# Altium PCB nrf52840_qfaa.PcbDoc
Units mm, origin at the board's own origin, x right, y up, seen from the top; angles counter-clockwise.
Board outline 16 x 13.5 mm, 2 copper layers (Top Layer, Bottom Layer), stack 1.671 mm thick; 23 components, 44 nets, 95 pads, 62 vias.
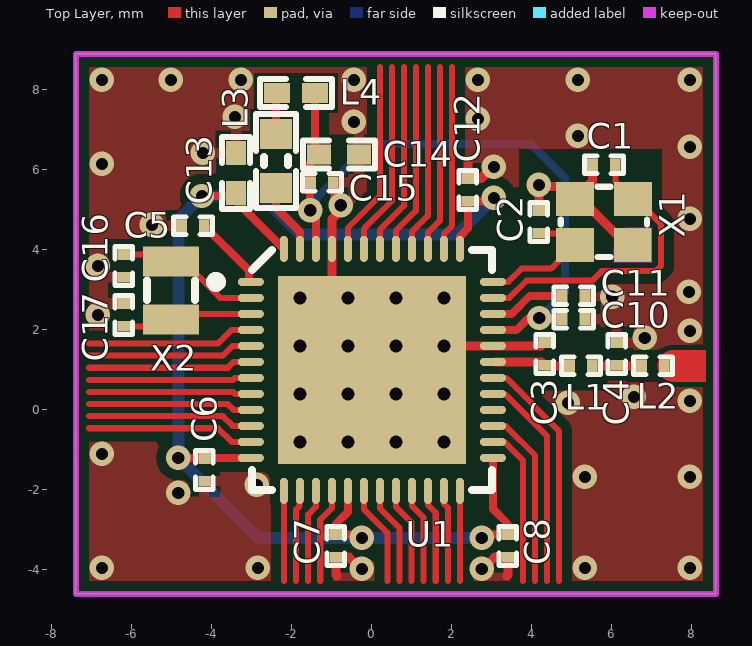
[diagram p0: Top Layer view]
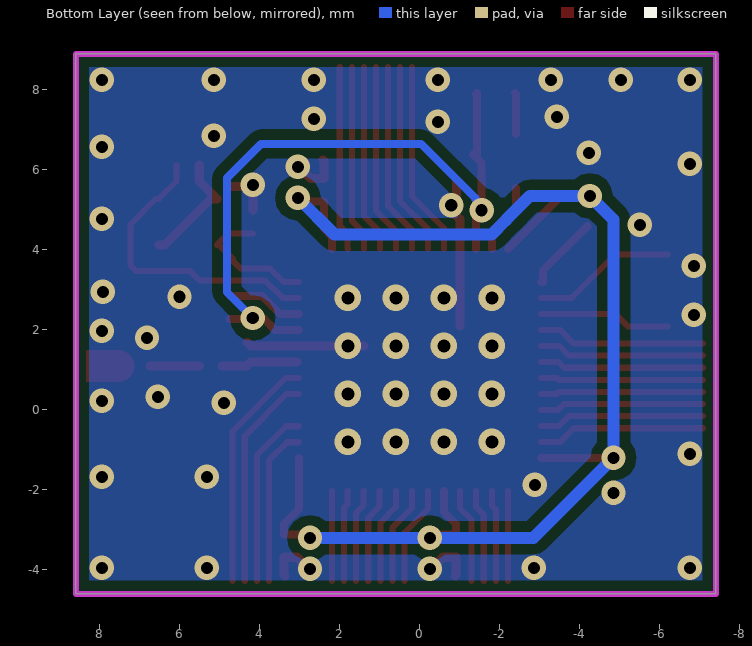
[diagram p1: Bottom Layer view, seen from below]
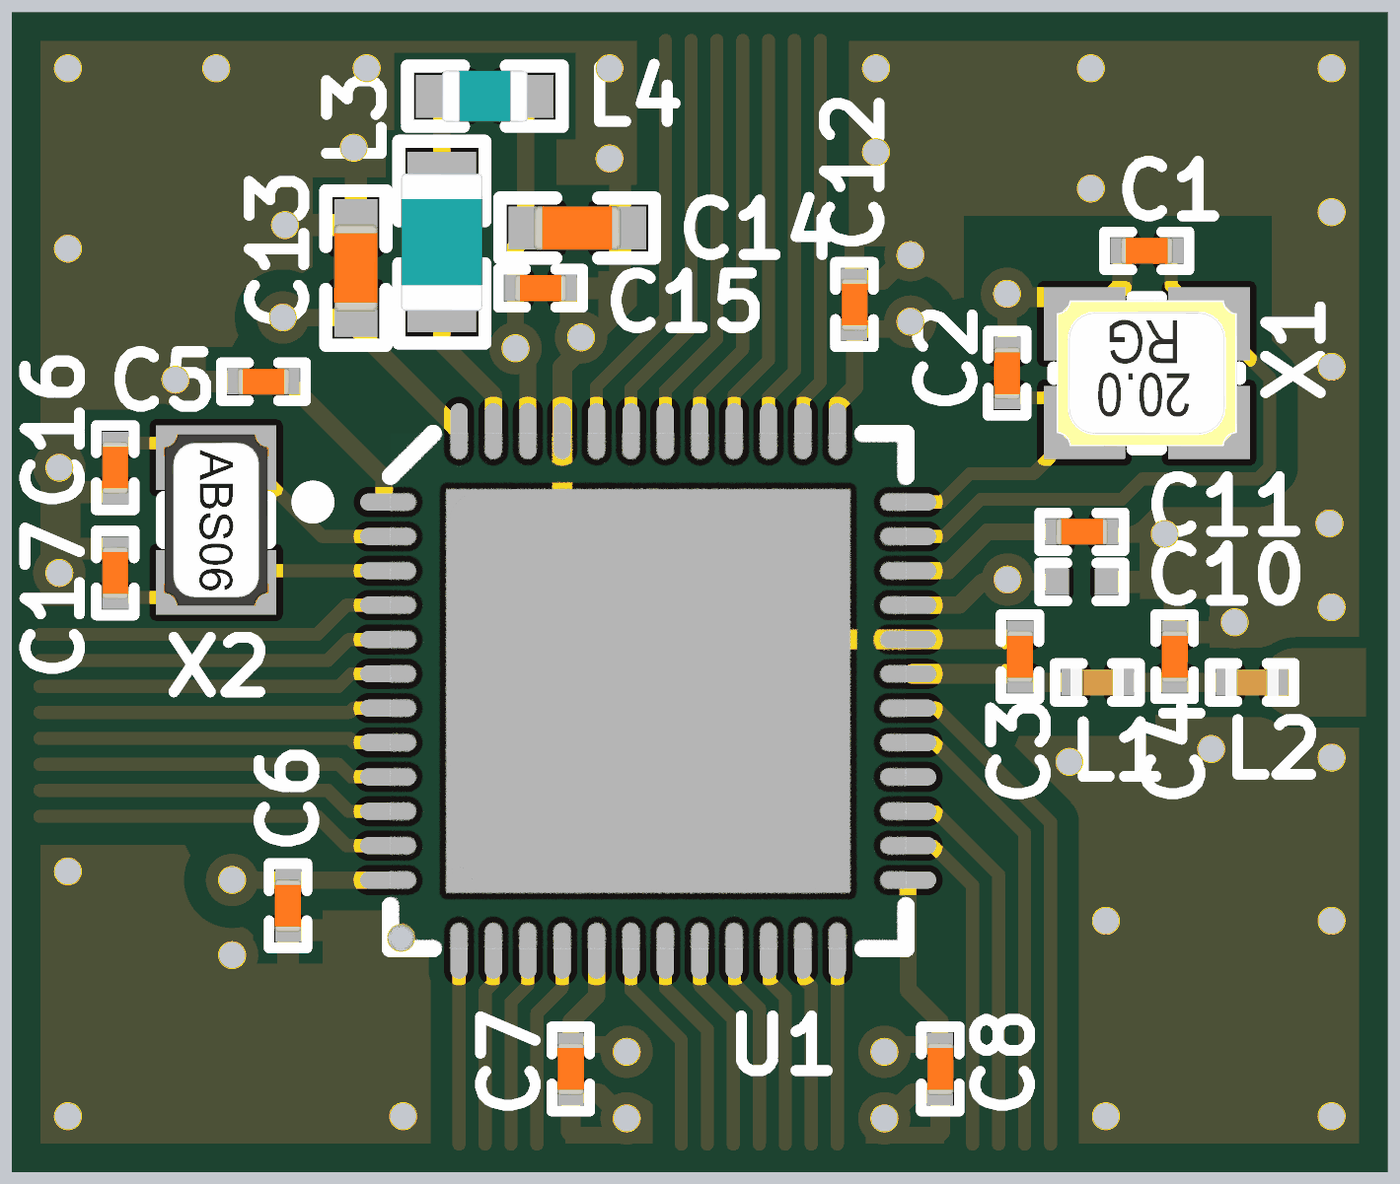
[diagram p2: 3D render of the assembled board from above, using the file's embedded part models]

## Layer stack, top to bottom
Top Solder: solder mask 0.0102, Solder Resist, Dk 3.5
Top Layer: signal copper 0.0356
Dielectric1: core 1.6002, FR-4, Dk 4.8
Bottom Layer: signal copper 0.0356
Bottom Solder: solder mask 0.0102, Solder Resist, Dk 3.5

## Board outline
-7.4,-4.6 8.6,-4.6 8.6,8.9 -7.4,8.9

## Design rules (kind name [scope] priority, off if disabled: settings)
Clearance Polygon_ANT [(InNamedPolygon('Top_Layer-GND')) or (InNamedPolygon('Bottom_Layer-GND')) vs InNet('RF')] p1: gap=0.127 ignorepadtopadclearanceinfootprint=FALSE except(0: Arc-Hole Track-Hole SMDPad-Hole THPad-Hole Via-Hole Fill-Hole Poly-Hole Region-Hole Text-Hole)
Clearance Polygon [(InNamedPolygon('Top_Layer-GND')) or (InNamedPolygon('Bottom_Layer-GND'))] p2: gap=0.254 ignorepadtopadclearanceinfootprint=FALSE except(0: Arc-Hole Track-Hole SMDPad-Hole THPad-Hole Via-Hole Fill-Hole Poly-Hole Region-Hole Text-Hole)
Clearance [All] p3: gap=0.15 ignorepadtopadclearanceinfootprint=FALSE
ComponentClearance [All] p1 off: gap=0.254 collisioncheckmode=3 verticalgap=0.254 showdistances=FALSE
FabricationTestPointUsage TestPointUsage [All] p1: valid=0 allowmultiple=FALSE
FabricationTestpoint Testpoint [All] p1: side=3 testpointundercomponent=TRUE minsize=1.016 maxsize=2.54 preferedsize=1.524 minholesize=0 maxholesize=1.016 preferedholesize=0.813 testpointgrid=0.025 allowsidetop=TRUE allowsidebottom=TRUE usegrid=TRUE gridtolerance=0
Height [All] p1 off: minheight=0 maxheight=25.4 prefheight=12.7
HoleSize [All] p1: absolutevalues=TRUE maxlimit=4.064 minlimit=0.305 maxpercent=80.000 minpercent=20.000
MinimumAnnularRing [All] p1 off: minimumring=0.152
PolygonConnect PolygonConnect_1 [isVia and innet(gnd)] p1: connectstyle=Direct reliefconductorwidth=0.254 reliefentries=4 polygonreliefangle="90 Angle" airgapwidth=0.254
PolygonConnect [All] p2: connectstyle=Relief reliefconductorwidth=0.254 reliefentries=4 polygonreliefangle="90 Angle" airgapwidth=0.254
RoutingVias [All] p1: holewidth=0.406 width=0.813 viastyle="Through Hole" minholewidth=0.254 minwidth=0.254 maxholewidth=0.711 maxwidth=1.27
SilkToSolderMaskClearance SilkscreenOverComponentPads [IsPad] p1: minsilkscreentomaskgap=0.254 clearancetoexposedcopper=TRUE
SolderMaskExpansion SolderMaskExpansion_via [IsVia] p1: expansion=0.102 istentingtop=TRUE
SolderMaskExpansion [All] p2: expansion=0.076 istentingtop=FALSE
Width [All] p1: maxlimit=2.54 minlimit=0.15 preferedwidth=0.15
24 further rules are at their usual default settings.

## Components (designator, comment, footprint, x,y, rotation, side; value= is the part's Value field where it differs from the comment)
C1 "12pF" CAPC0603X03L_C#1 5.8,6.125 r180 top
C2 "12pF" CAPC0603X03L_C#1 4.175,4.7 r90 top
C3 "1.0pF" CAPC0603X03L_C#1 4.325,1.4 r270 top
C4 "1.2pF" CAPC0603X03L_C#1 6.125,1.4 r270 top
C5 "100nF" CAPC0603X03L_C#2 -4.475,4.601 r180 top
C6 "100nF" CAPC0603X03L_C#2 -4.19,-1.5 r270 top
C7 "100nF" CAPC0603X03L_C#2 -0.9,-3.4 r270 top
C8 "100nF" CAPC0603X03L_C#2 3.398,-3.4 r270 top
C10 "N.C." CAPC0603X03L_C_NC 5.045,2.27 r180 top
C11 "100pF" CAPC0603X03L_C#1 5.045,2.854 r0 top
C12 "100nF" CAPC0603X03L_C#2 2.4,5.5 r90 top
C13 "1.0µF" CAPC1005X04L -3.4,5.925 r90 top
C14 "1.0µF" CAPC1005X04L -0.825,6.39 r180 top
C15 "47nF" CAPC0603X03L_C#1 -1.251,5.69 r0 top
C16 "12pF" CAPC0603X03L_C#2 -6.2,3.6 r270 top
C17 "12pF" CAPC0603X03L_C#2 -6.2,2.375 r90 top
L1 "4.7nH" INDC0603X03L_C 5.225,1.1 r0 top
L2 "2.2nH" INDC0603X03L_C 7.025,1.1 r0 top
L3 "10µH" INDC1608X06L -2.4,6.225 r270 top
L4 "15nH" INDC1005X04L -1.9,7.925 r180 top
U1 "nRF52840-QFAA" QFN40P600X600X90-48N 0,1 r0 top locked
X1 "32MHz" XTAL_2016_NT 5.8,4.7 r180 top
X2 "32.768kHz" XTAL_2012 -5.025,2.99 r270 top

## Footprints (in the part's own frame and the unit in brackets; to place one, negate y for a bottom-side part, rotate by r counter-clockwise, add the part's x,y. Pads: shape width x height; smd on the part's side, far side on the other; paste and mask are expansions set on the pad)
CAPC0603X03L_C#1 [mm] "Chip Capacitor, 2-Leads, Body 0.6x0.3mm, IPC High Density"
  rect 0.27x0.3 smd: 1(-0.285,0) 2(0.285,0)
  silkscreen extent -0.49,-0.22 0.49,0.22, body extent -0.3,-0.15 0.31,0.15, height 0.3
CAPC0603X03L_C#2 [mm] "Chip Capacitor, 2-Leads, Body 0.6x0.3mm, IPC High Density"
  rect 0.27x0.3 smd mask+0.05: 1(-0.285,0) 2(0.285,0)
  silkscreen extent -0.49,-0.22 0.49,0.22, body extent -0.3,-0.15 0.31,0.15, height 0.3
CAPC0603X03L_C_NC [mm] "Chip Capacitor, 2-Leads, Body 0.6x0.3mm, IPC High Density"
  rect 0.27x0.3 smd mask+0.05: 1(-0.285,0) 2(0.285,0)
  silkscreen extent -0.49,-0.22 0.49,0.22
CAPC1005X04L [mm] "Chip Capacitor, 2-Leads, Body 1.0x0.5mm, IPC High Density"
  rect 0.6x0.5 smd: 1(-0.5,0) 2(0.5,0)
  silkscreen extent -0.9,-0.35 0.9,0.35, body extent -0.51,-0.25 0.51,0.25, height 0.5
INDC0603X03L_C [mm] "Chip Inductor, 2-Leads, Body 0.6x0.3mm, IPC High Density"
  rect 0.27x0.3 smd: 1(-0.285,0) 2(0.285,0)
  silkscreen extent -0.49,-0.22 0.49,0.22, body extent -0.31,-0.16 0.31,0.16, height 0.26
INDC1005X04L [mm] "Chip Inductor, 2-Leads, Body 1.0x0.5mm, IPC High Density"
  rect 0.65x0.5 smd: 1(-0.475,0) 2(0.475,0)
  silkscreen extent -0.9,-0.35 0.9,0.35, body extent -0.5,-0.3 0.5,0.3, height 0.5
INDC1608X06L [mm] "Chip Inductor, 2-Leads, Body 1.6x0.8mm, IPC High Density"
  rect 0.75x0.8 smd: 1(-0.675,0) 2(0.675,0)
  silkscreen extent -1.17,-0.5 1.17,0.5, body extent -0.8,-0.48 0.8,0.48, height 0.8
QFN40P600X600X90-48N [mm] "QFN, 48-Leads, Body 6,0x6,0mm (max), Pitch 0,40mm, IPC Medium Density"
  oval 0.65x0.2 smd: 1(-3.025,2.2) 2(-3.025,1.8) 3(-3.025,1.4) 4(-3.025,1) 5(-3.025,0.6) 6(-3.025,0.2) 7(-3.025,-0.2) 8(-3.025,-0.6) 9(-3.025,-1) 10(-3.025,-1.4) 11(-3.025,-1.8) 12(-3.025,-2.2) 25(3.025,-2.2) 26(3.025,-1.8) 27(3.025,-1.4) 28(3.025,-1) 29(3.025,-0.6) 30(3.025,-0.2) 31(3.025,0.2) 32(3.025,0.6) 33(3.025,1) 34(3.025,1.4) 35(3.025,1.8) 36(3.025,2.2)
  oval 0.2x0.65 smd: 13(-2.2,-3.025) 14(-1.8,-3.025) 15(-1.4,-3.025) 16(-1,-3.025) 17(-0.6,-3.025) 18(-0.2,-3.025) 19(0.2,-3.025) 20(0.6,-3.025) 21(1,-3.025) 22(1.4,-3.025) 23(1.8,-3.025) 24(2.2,-3.025) 37(2.2,3.025) 38(1.8,3.025) 39(1.4,3.025) 40(1,3.025) 41(0.6,3.025) 42(0.2,3.025) 43(-0.2,3.025) 44(-0.6,3.025) 45(-1,3.025) 46(-1.4,3.025) 47(-1.8,3.025) 48(-2.2,3.025)
  rect 4.7x4.7 smd: 49(0,0)
  silkscreen extent -4.02,-3 3,3, body extent -3.02,-3.02 3.02,3.02, height 0.86
XTAL_2012 [mm] "XTAL SMD 2.0 x 1.2 mm"
  rect 0.75x1.4 smd: 1(-0.725,0) 2(0.725,0)
  silkscreen extent -0.24,-0.6 0.24,0.6, body extent -1,-0.61 1,0.61, height 0.6
XTAL_2016_NT [mm] "Crystal 2.0 x 1.6 mm"
  rect 0.95x0.85 smd: 1(-0.725,-0.575) 2(-0.725,0.575) 2(0.725,-0.575) 3(0.725,0.575)
  Top Layer lines w0.225: 0.725,-0.575 0.575,-0.575 -0.575,0.575 -0.725,0.575
  Top Layer keep-out lines w0.01: -0.25,0.65 -0.25,1 -1.2,1 -1.2,0.15 -0.55,0.15
  silkscreen extent -1.08,-0.88 1.08,0.88, body extent -1.05,-0.85 1.05,0.85, height 0.56

## Part data
C1 C2 C16 C17: library part C0201-12p, "Capacitor, NP0, ±2%", Component Class=Capacitors, Footprint Doc=0201, LatestRevisionDate=2017-11-09, Pad Count=2, Part Number=C0201-12p, Published=2014-11-13
C3: library part C0201-1.0p, "Capacitor, NP0, ±10%", Component Class=Capacitors, Footprint Doc=0201, LatestRevisionDate=2018-10-22, Pad Count=2, Part Number=C0201-1.0p, Published=2014-11-13
C4: library part C0201-1.2p, "Capacitor, NP0, ±10%", Component Class=Capacitors, Footprint Doc=0201, LatestRevisionDate=2020-10-13, Pad Count=2, Part Number=C0201-1.2p, Published=2014-11-13
C5 C6 C7 C8 C12: library part C0201-100n, "Capacitor, X5R, ±10%", Component Class=Capacitors, Footprint Doc=0201, LatestRevisionDate=2017-11-09, Pad Count=2, Part Number=C0201-100n, Published=2014-11-13
C10: library part C0201-N.C., "Not mounted", Assembly="Not mounted", Component Class=Capacitors, Footprint Doc=0201, LatestRevisionDate=2014-11-13, Pad Count=2, Part Number=C0201-N.C., Published=2014-11-13
C11: library part C0201-100p, "Capacitor, NP0, ±5%", Component Class=Capacitors, Footprint Doc=0201, LatestRevisionDate=2019-04-16, Pad Count=2, Part Number=C0201-100p, Published=2019-04-16
C13 C14: library part C0402-1µ0, "Capacitor, X5R, ±10%", Component Class=Capacitors, Footprint Doc=0402, LatestRevisionDate=2016-08-22, Pad Count=2, Part Number=C0402-1µ0, Published=2009-05-08
C15: library part C0201-47n, "Capacitor, X5R, ±10%", Component Class=Capacitors, Footprint Doc=0201, LatestRevisionDate=2017-11-09, Pad Count=2, Part Number=C0201-47n, Published=2014-11-13
L1: library part L0201-4n7, "High frequency chip inductor ±5%", Component Class=Inductors, Footprint Doc=0201, LatestRevisionDate=2013-04-10, Pad Count=2, Part Number=L0201-4n7, Published=2013-04-10
L2: library part L0201-2n2, "High frequency chip inductor ±5%", Component Class=Inductors, Footprint Doc=0201, LatestRevisionDate=2013-04-10, Pad Count=2, Part Number=L0201-2n2, Published=2013-04-10
L3: library part L0603-10µ-TDK, "Chip inductor, IDC,min = 50 mA, ±20%", Component Class=Inductors, Footprint Doc=0603, LatestRevisionDate=2012-09-19, Pad Count=2, Part Number=L0603-10µ-TDK, Published=2019-05-06
L4: library part L0402-15n, "High frequency chip inductor ±10%", Component Class=Inductors, Footprint Doc=0402, LatestRevisionDate=2012-09-19, Pad Count=2, Part Number=L0402-15n, Published=2010-07-12
U1: "Multi-protocol Bluetooth Low Energy, IEEE 802.15.4, ANT and 2.4GHz proprietary system-on-chip", Component Class=nRF_Devices, Footprint Doc=QFN-48, LatestRevisionDate=2016-11-22, Pad Count=48, Part Number=nRF52840-QFAA, Published=2016-03-31
X1: library part XTAL_SMD2016_32MHz_8pF_General_NT, "XTAL SMD 2016, 32MHz, Cl=8pF, Total Tol: ±30ppm", Component Class=Oscillators, Footprint Doc=XTAL_2016, LatestRevisionDate=2021-04-08, Pad Count=4, Part Number=XTAL_SMD2016_32MHz_8pF_General_NT, Published=2021-04-08
X2: library part XTAL_SMD2012_32.768kHz_9pF_General, "XTAL SMD 2012, 32.768kHz, Cl=9pF, Total Tol: ±50ppm", Component Class=Oscillators, Footprint Doc=XTAL_2012, LatestRevisionDate=2017-01-11, Pad Count=2, Part Number=XTAL_SMD2012_32.768kHz_9pF_General, Published=2016-08-19

## Via types
v1: diameter 0.61, hole 0.305, Top Layer to Bottom Layer, tented both sides, 46 vias
v2: diameter 0.66, hole 0.33, Top Layer to Bottom Layer, tented both sides, 16 vias

## Nets (pads, with @x,y where several pads share a name; then routed paths per layer and width w, separated by ;. In a path a pad name is that pad's centre, name@x,y a point inside that pad or via, vN(x,y) a via of type N, cw(c..) or ccw(c..) an arc to the next point about the centre after c; other vN are vias at no path point)
DEC1: C5.1 U1.1 | length 1.9
  Top Layer w0.2: C5.1 -4.19,4.586 -4.155,4.551 -4.14,4.551 -3.071,3.483 -3.071,3.2 U1.1
DEC3: C11.1 U1.34 | length 1.9
  Top Layer w0.2: U1.34 3.493,2.4 3.946,2.853 C11.1@4.74,2.853
DEC4_6: C10.2 C14.2 C15.1 L4.1 U1.33 U1.46 | length 17.1
  Top Layer w0.2: v1(-1.543,4.991) -1.543,6.172 C14.2 ; C14.2@-1.425,6.39 L4.1 L4.1@-1.4,7.9 ; U1.46 v1@-1.4,4.94 ; U1.33 3.62,2 3.89,2.27 C10.2
  Bottom Layer w0.2: v1(-1.543,4.991) -1.543,5.101 -1.39,5.254 -1.39,5.293 -0.033,6.65 3.975,6.65 4.825,5.8 4.825,2.942 v1(4.181,2.298)
GND: C1.2 C2.2 C3.1 C4.1 C5.2 C6.2 C7.2 C8.2 C10.1 C11.2 C12.2 C13.2 C14.1 C15.2 C16.2 C17.2 U1.32 U1.45 U1.49 X1.2 | length 12.8
  Top Layer w0.229: U1.49@-1,2.095 U1.45 -1,4.766 -0.775,4.991 v1@-0.775,5.275 ; C15.2@-0.915,5.69 -0.915,5.226 v1@-0.781,5.092 ; -0.875,-4.15 -0.9,-4.125 C7.2 -0.574,-3.685 -0.284,-3.975 v1(-0.25,-3.975) ; U1.49@1.4,1.6 4.231,1.6 C3.1@4.316,1.685 ; 2.425,6.25 2.4,6.225 C12.2 2.726,5.785 3.016,6.075 v1(3.05,6.075) ; v1(2.748,-3.975) 2.782,-3.975 3.072,-3.685 C8.2 3.398,-4.125 3.373,-4.15 ; C2.2 v1(4.175,5.625) ; v1@4.214,5.586 X1.2@4.764,5.586 ; X1.2@5.075,5.275 5.515,5.715 C1.2
  other v1: -6.75,-3.95 -2.85,-3.95 5.325,-3.95 7.95,-3.95 -4.84,-2.075 -2.875,-1.875 5.325,-1.675 7.95,-1.675 -6.75,-1.1 4.9,0.175 7.95,0.225 6.55,0.325 6.823,1.8 7.95,1.975 -6.85,2.375 6.01,2.829 7.925,2.95 -6.85,3.6 -5.5,4.625 7.95,4.775 -0.781,5.117 -6.75,6.15 -4.225,6.425 7.95,6.575 5.15,6.85 -0.45,7.2 2.65,7.275 -3.425,7.325 -6.75,8.25 -5.025,8.25 -3.275,8.25 -0.45,8.25 2.65,8.25 5.15,8.25 7.95,8.25
  other v2: -1.8,-0.8 -0.6,-0.8 0.6,-0.8 1.8,-0.8 -1.8,0.4 -0.6,0.4 0.6,0.4 1.8,0.4 -1.8,1.6 -0.6,1.6 0.6,1.6 1.8,1.6 -1.8,2.8 -0.6,2.8 0.6,2.8 1.8,2.8
NetC3_2: C3.2 L1.1 U1.31 | length 1.9
  Top Layer w0.229: U1.31@3.075,1.2 4.231,1.2 4.316,1.115 4.331,1.1 L1.1
NetC4_2: C4.2 L1.2 L2.1 | length 1.2
  Top Layer w0.229: L1.2 6.125,1.1 L2.1
NetL3_1: L3.1 L4.2 | length 1
  Top Layer w0.2: L3.1 -2.4,7.9 L4.2
NetL3_2: L3.2 U1.47 | length 1.8
  Top Layer w0.2: L3.2 -2.4,5.045 -1.8,4.445 U1.47
P0.00/XL1: C16.1 U1.2 X2.1 | length 3.6
  Top Layer w0.152: C16.1 -4.88,3.885 -3.795,2.8 U1.2
P0.01/XL2: C17.1 U1.3 X2.2 | length 3.3
  Top Layer w0.152: C17.1 -5.2,2.09 X2.2 -4.89,2.4 U1.3
P0.02/AIN0: U1.40 | length 4.7
  Top Layer w0.15: U1.40 1,4.452 1.4,4.852 1.4,8.575
P0.03/AIN1: U1.39 | length 4.7
  Top Layer w0.152: U1.39 1.4,4.426 1.701,4.727 1.701,8.575
P0.04/AIN2: U1.4 | length 4.2
  Top Layer w0.152: -7.075,1.658 -3.851,1.658 -3.509,2 U1.4
P0.05/AIN3: U1.5 | length 4.2
  Top Layer w0.152: -7.075,1.356 -3.726,1.356 -3.482,1.6 U1.5
P0.07: U1.6 | length 4.1
  Top Layer w0.152: -7.075,1.054 -3.6,1.054 -3.454,1.2 U1.6
P0.08: U1.7 | length 4.1
  Top Layer w0.152: -7.075,0.751 -3.475,0.751 -3.426,0.8 U1.7
P0.09/NFC1: U1.29 | length 5.4
  Top Layer w0.152: U1.29 3.325,0.4 4.379,-0.654 4.379,-4.275
P0.10/NFC2: U1.30 | length 6
  Top Layer w0.152: U1.30 3.353,0.8 4.682,-0.529 4.682,-4.275
P0.11: U1.10 | length 4.2
  Top Layer w0.152: -7.075,-0.156 -3.726,-0.156 -3.482,-0.4 U1.10
P0.12: U1.11 | length 4.2
  Top Layer w0.152: -7.075,-0.458 -3.851,-0.458 -3.509,-0.8 U1.11
P0.13: U1.13 | length 2.3
  Top Layer w0.152: -2.2,-4.275 U1.13
P0.14: U1.14 | length 2.3
  Top Layer w0.152: -1.898,-4.275 -1.898,-2.496 -1.806,-2.404 -1.806,-2.031 U1.14
P0.17: U1.15 | length 2.3
  Top Layer w0.152: -1.595,-4.275 -1.595,-2.621 -1.4,-2.426 U1.15
P0.18/RESET: U1.16 | length 2.4
  Top Layer w0.152: -1.293,-4.275 -1.293,-2.747 -1,-2.454 U1.16
P0.19: U1.18 | length 2.5
  Top Layer w0.152: U1.18 -0.2,-2.482 0.386,-3.067 0.386,-4.275
P0.20: U1.19 | length 2.5
  Top Layer w0.152: U1.19 0.2,-2.454 0.688,-2.942 0.688,-4.275
P0.21: U1.20 | length 2.4
  Top Layer w0.152: U1.20 0.6,-2.426 0.99,-2.817 0.99,-4.275
P0.22: U1.21 | length 2.4
  Top Layer w0.152: U1.21 1.006,-2.031 1.006,-2.404 1.293,-2.691 1.293,-4.275
P0.23: U1.22 | length 2.3
  Top Layer w0.152: U1.22 1.409,-2.034 1.409,-2.38 1.595,-2.566 1.595,-4.275
P0.24: U1.23 | length 2.3
  Top Layer w0.152: U1.23 1.809,-2.034 1.809,-2.352 1.898,-2.441 1.898,-4.275
P0.28/AIN4: U1.41 | length 4.8
  Top Layer w0.15: U1.41 0.6,4.476 1.1,4.976 1.1,8.575
P0.29/AIN5: U1.42 | length 4.8
  Top Layer w0.15: U1.42 0.2,4.5 0.8,5.1 0.8,8.575
P0.30/AIN6: U1.43 | length 4.8
  Top Layer w0.15: U1.43 -0.2,4.525 0.5,5.224 0.5,8.575
P0.31/AIN7: U1.44 | length 4.9
  Top Layer w0.15: U1.44 -0.6,4.549 0.2,5.349 0.2,8.575
P1.00: U1.24 | length 2.3
  Top Layer w0.152: 2.2,-4.275 U1.24
P1.08: U1.8 | length 4.1
  Top Layer w0.152: -7.075,0.449 -3.475,0.449 -3.426,0.4 U1.8
P1.09: U1.9 | length 4.1
  Top Layer w0.152: -7.075,0.146 -3.6,0.146 -3.454,0 U1.9
P1.15: U1.38 | length 4.6
  Top Layer w0.152: U1.38 1.806,4.031 1.806,4.404 2.003,4.601 2.003,8.575
RF: L2.2 | length 0.4
  Top Layer w0.8: 7.535,1.1 7.95,1.1
SWDCLK: U1.27 | length 4.5
  Top Layer w0.152: U1.27 3.034,-0.409 3.348,-0.409 4.077,-1.138 4.077,-4.275
SWDIO: U1.26 | length 4
  Top Layer w0.152: U1.26 3.034,-0.809 3.32,-0.809 3.774,-1.263 3.774,-4.275
VDD_NRF: C6.1 C7.1 C8.1 C12.1 C13.1 U1.12 U1.17 U1.25 U1.37 U1.48 | length 33.9
  Top Layer w0.2: v1@-4.63,-1.2 U1.12 ; v1(-4.25,5.349) -3.524,5.349 U1.48 ; U1.17 -0.6,-2.55 -0.898,-2.848 -0.898,-3.112 C7.1 v1@-0.438,-3.115 ; U1.37 2.2,4.337 2.403,4.54 2.403,5.212 C12.1 2.862,5.215 2.947,5.3 v1(3.05,5.3) ; v1(2.748,-3.2) 2.851,-3.2 2.936,-3.115 C8.1 3.395,-3.112 3.395,-2.848 3.025,-2.477 U1.25
  Bottom Layer w0.3: v1(2.748,-3.2) -2.84,-3.2 v1(-4.84,-1.2) -4.84,4.758 v1(-4.25,5.349) -2.749,5.349 -2.148,4.748 -2.148,4.74 -1.794,4.386 2.136,4.386 v1(3.05,5.3)
  other v1: -0.25,-3.2
XC1: C1.1 U1.35 X1.1 | length 7.6
  Top Layer w0.15: U1.35 3.434,2.8 3.864,3.23 5.505,3.23 5.745,3.47 7.095,3.47 7.23,3.605 7.23,4.645 6.6,5.275 X1.1 6.085,5.715 C1.1
XC2: C2.1 U1.36 X1.3 | length 3.5
  Top Layer w0.15: U1.36 3.41,3.2 3.74,3.53 4.48,3.53 4.675,3.725 4.675,3.775 5.025,4.125 X1.3 4.785,4.415 C2.1
pads on no net: U1.28

## Polygon pours and split planes (outlines as drawn)
GND on Bottom Layer "Bottom_Layer-GND" (solid, remove dead copper, pour order 1001): -9.474,10.16 -9.474,-6.761 10.008,-6.761 10.008,10.16 -9.474,10.16
GND on Top Layer "Top_Layer-GND" (solid, remove dead copper, pour order 1000): -8.966,10.414 -8.966,-6.761 9.22,-6.761 9.22,10.414 -8.966,10.414

## Keep-outs
Keep-Out Layer:
  the board outline again, w0.152

## Other copper
Top Layer:
  rectangle net RF: 7.825,0.7 8.35,1.5
  pour cut-out: 7.254,6.529 3.675,6.529 3.675,3.275 7.254,3.275
  pour cut-out: 4.125,1.991 5.8,1.991 5.8,1.525 5.9,1.525 5.9,0.475 4.125,0.475

## Silkscreen, mask and mechanical layers (free items; w line width, h text height)
Mechanical 1:
  the board outline again, w0.152

## Dimensions
8.6,8.9 to 8.6,-4.6 on Mechanical 3
-7.4,-4.6 to 8.6,-4.6 on Mechanical 3